# EAGLE board wind vane (EAGLE 6.4)
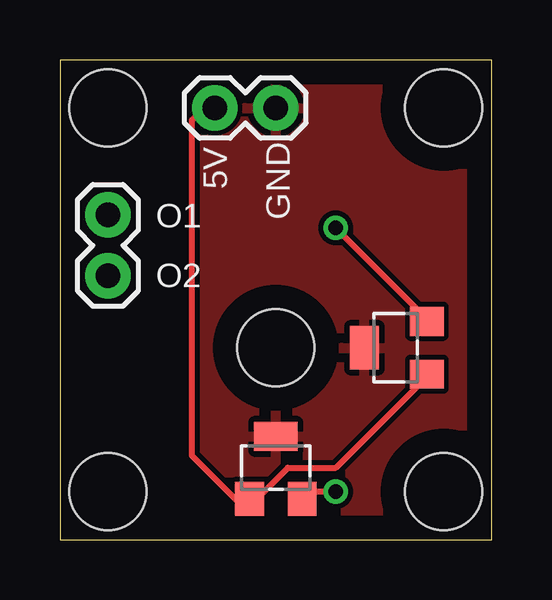
[diagram p0: board, top side]
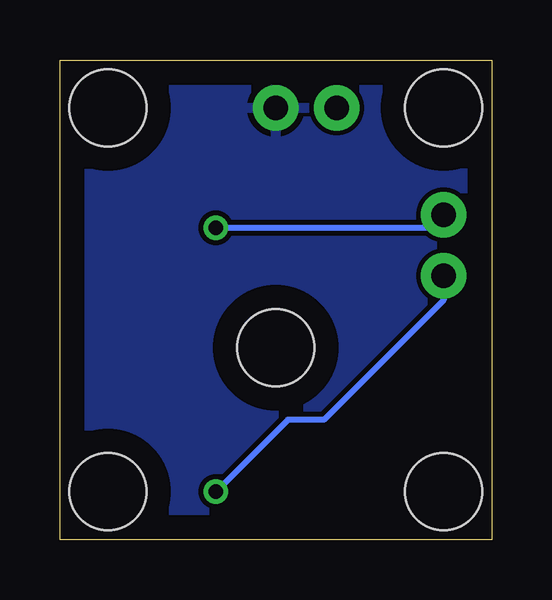
[diagram p1: board, bottom side, seen from below]

Size 18 x 20 mm. Coordinates in mm from the lower left corner, seen from the top.
Outline: 0,0 18,0 18,20 0,20 0,0
Copper layers (1*16): Top 0.035mm / dielectric 1.5mm / Bottom 0.035mm
Design rules "default": minimum track width 10mil, minimum drill 24mil, track to track 8mil, track to pad 8mil, pad to pad 8mil, via to via 8mil, smd to smd 8mil, copper to edge 40mil, drill to drill 8mil, minimum pad ring 10mil, minimum via ring 8mil, stop-mask expansion 4mil, vias tented up to drill 0mil, thermal gap 10mil
Holes 3.2 mm at 9,8 2,2 16,2 16,18 2,18

## Footprints (pad centres in the part's own frame; a part is rotated, then mirrored left to right if it is on the bottom)
SOT23-W = smd 1.2 x 1.4: 1 -1.1,-1.3; 2 1.1,-1.3 | smd 1.8 x 1.2: 3 0,1.3
1X02 = drill 1.016 pad 1.88: 1 0,0; 2 2.54,0

## Placement (x,y rotation side)
IC1  A1323LH  [SOT23-W]  14,8 90 top
IC2  A1323LH  [SOT23-W]  9,3 0 top
JP1  M02PTH  [1X02]  9,18 180 top
JP2  M02PTH  [1X02]  2,11 90 top

## Library data of the parts
IC1 IC2 = allegro; MF: ALLEGRO MICROSYSTEMS, INC.; MPN: A1323LLHLT-T; OC_FARNELL: 1651968; OC_NEWARK: 65K5152
JP1 JP2 = SparkFun-Connectors

## Nets
5V: IC1.1 IC2.1 JP1.2
GND: IC1.3 IC2.3 JP1.1
N$7: IC1.2 JP2.2
N$8: IC2.2 JP2.1

## Tracks (layer width: path | path; a pad name or v marks a point on that pad's centre or on a via)
5V
  Top 0.254: IC1.1 15,6.5 11.5,3 9.5,3 8,1.5 IC2.1 7.5,1.5 5.5,3.5 5.5,17.5 6,18 JP1.2
GND
  pour Bottom: 0,0 0,20 18,20 18,0
  pour Top: 0,20 18,20 18,0 0,0
N$7  (via drill 0.61)
  Top 0.254: v11.5,13 15,9.5 IC1.2
  Bottom 0.254: v11.5,13 2.5,13 2,13.5 JP2.2
N$8  (via drill 0.61)
  Top 0.254: v11.5,2 10.5,2 IC2.2
  Bottom 0.254: v11.5,2 8.5,5 7,5 2,10 JP2.1

## Text on the board
tPlace: 5V | O1 | GND | O2